# Altium PCB Tigershark 3D R2.2.PcbDoc (part 3 of 4)
Units mil, origin at the board's own origin, x right, y up, seen from the top; angles counter-clockwise.
Board outline 4100 x 4050 mil, 4 copper layers (Top Layer, Groun Plane, Power Plane, Bottom Layer), stack 61.73 mil thick; 359 components, 238 nets, 1141 pads, 830 vias.
Unrouted connection lines stored in the file: 3.
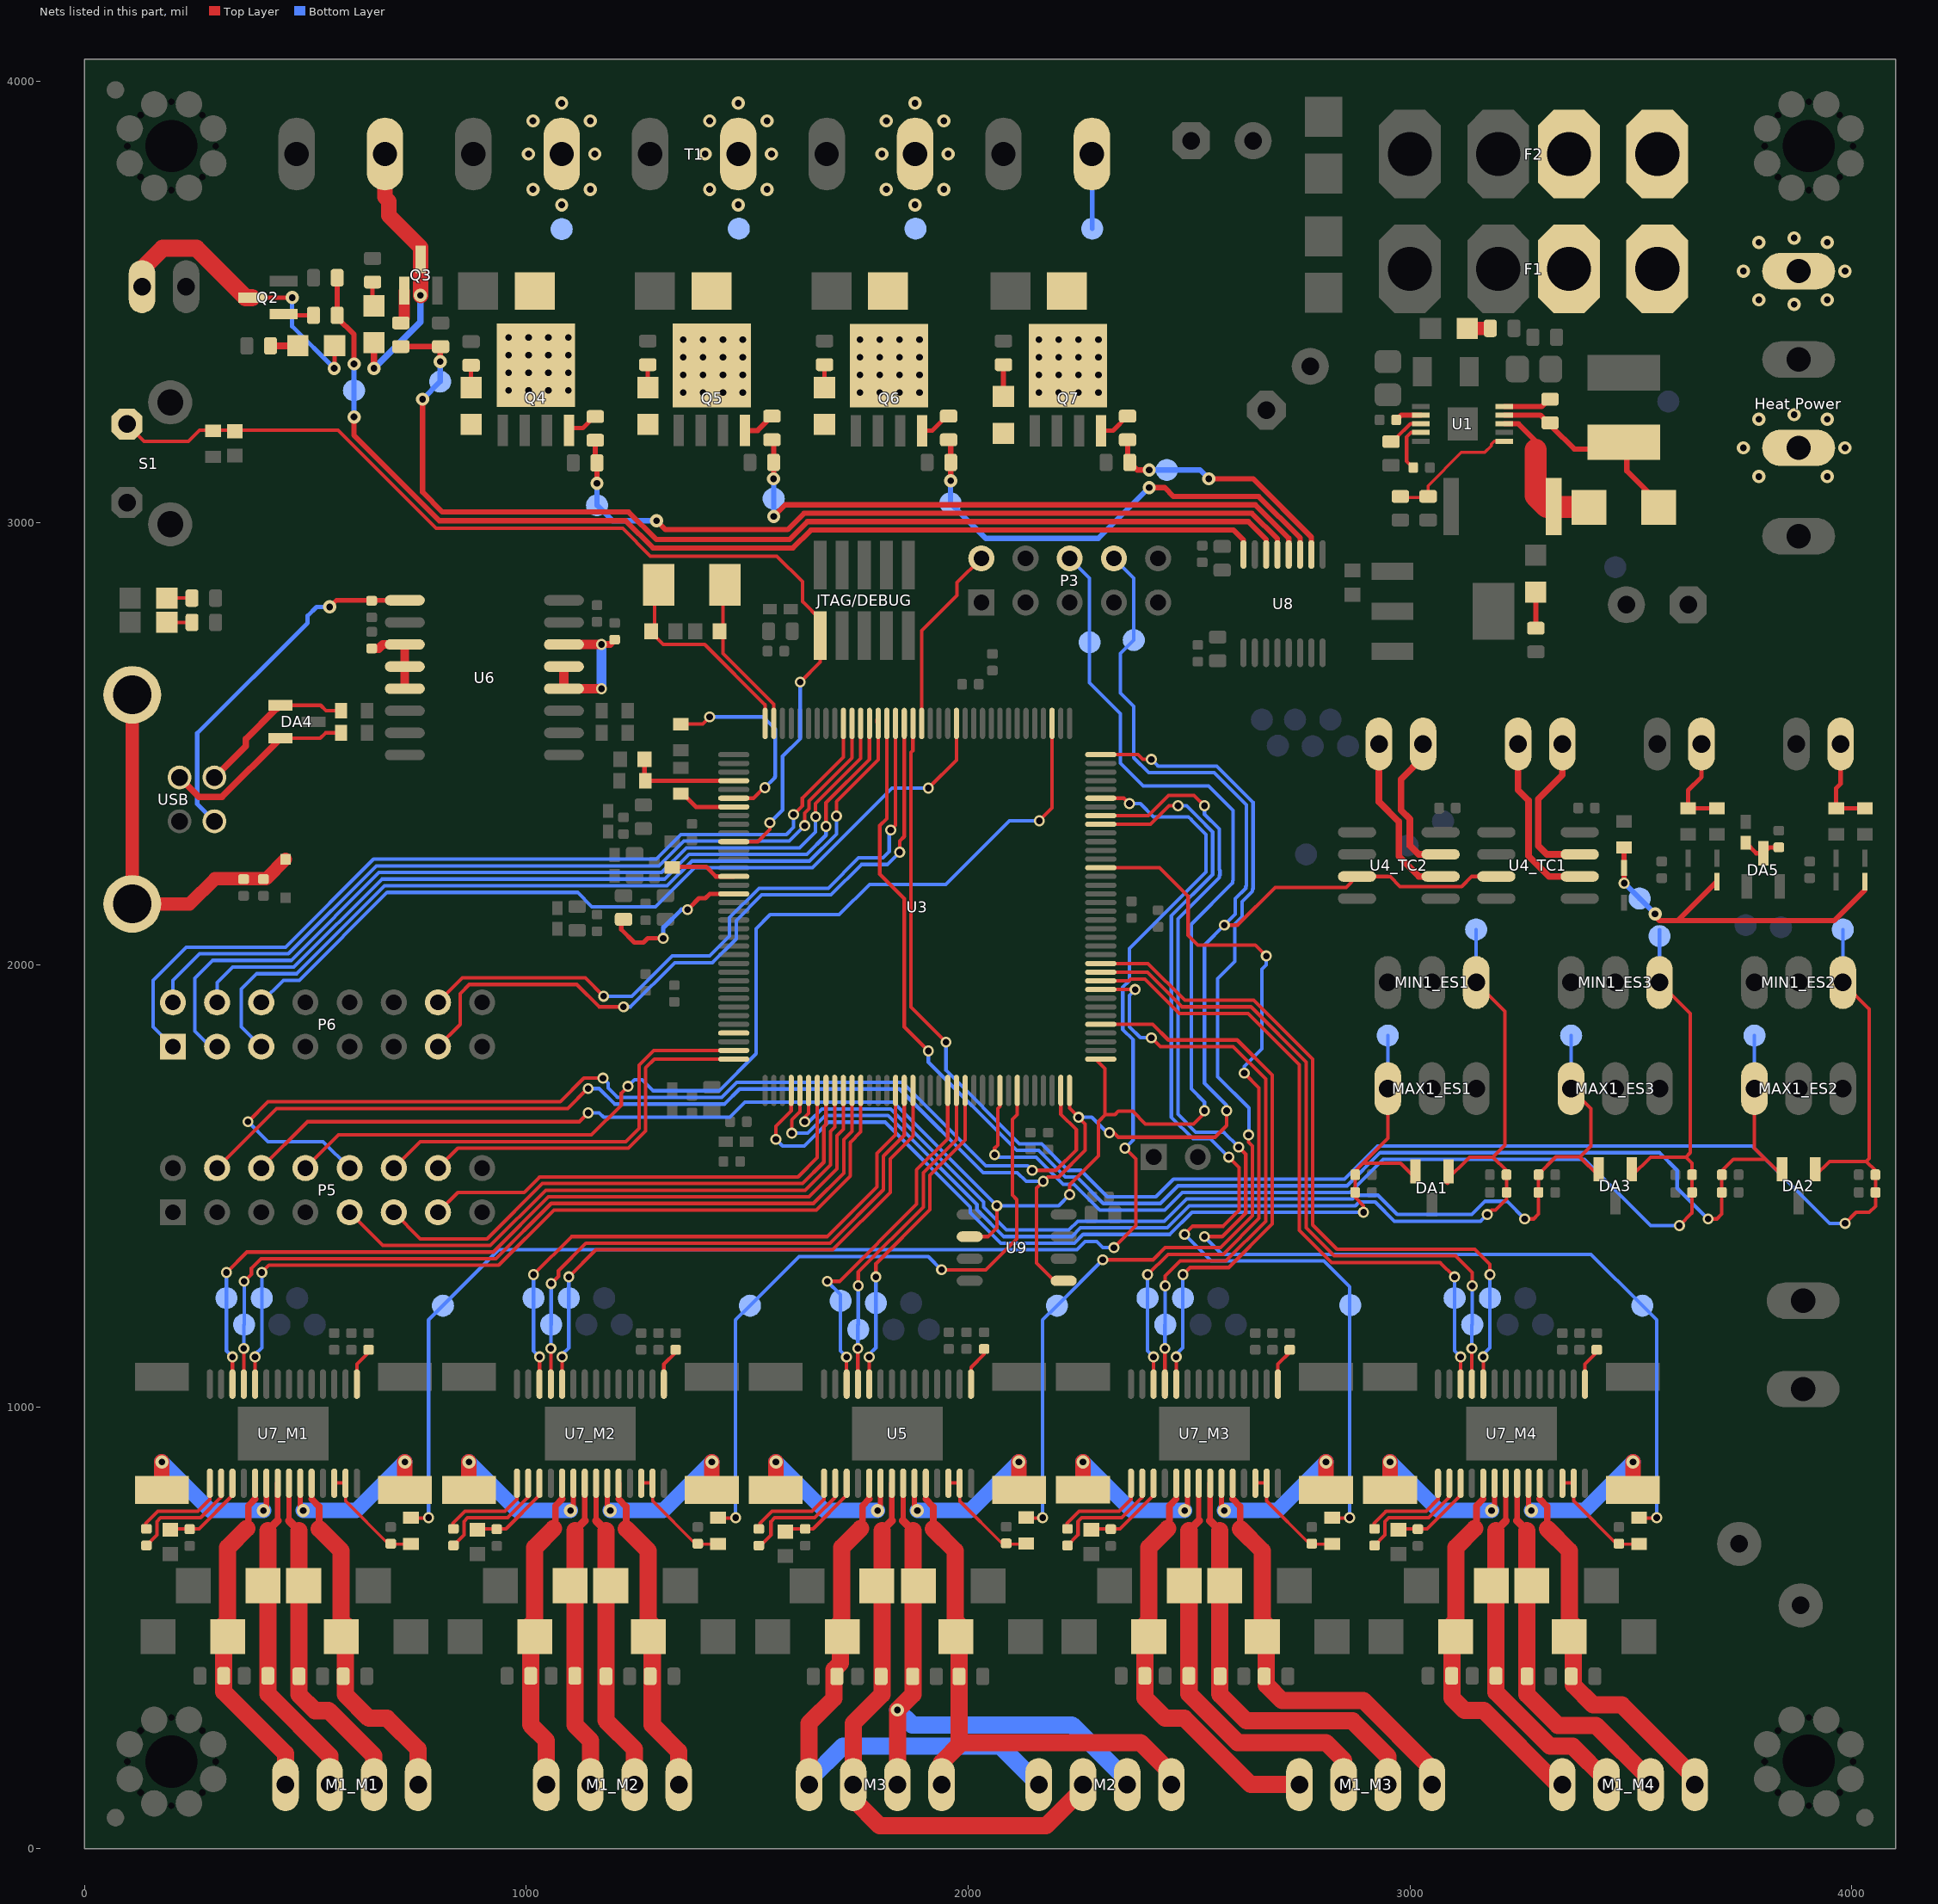
[diagram p5: the nets of this part, all layers, seen from the top]

## Via types
v1: diameter 30, hole 15, Top Layer to Bottom Layer, tented both sides, 528 vias
v2: diameter 25, hole 15, Top Layer to Bottom Layer, tented both sides, 154 vias
v3: diameter 19.68, hole 7.87, Top Layer to Bottom Layer, 75 vias
v4: diameter 25, hole 15, Top Layer to Bottom Layer, 61 vias
v5: diameter 30, hole 15, Top Layer to Bottom Layer, 9 vias
v6: diameter 45, hole 20, Top Layer to Bottom Layer, tented both sides, 2 vias
v7: diameter 25, hole 15, Top Layer to Bottom Layer, tented bottom, 1 vias

## Nets (pads, with @x,y where several pads share a name; then routed paths per layer and width w, separated by ;. In a path a pad name is that pad's centre, name@x,y a point inside that pad or via, vN(x,y) a via of type N, cw(c..) or ccw(c..) an arc to the next point about the centre after c; other vN are vias at no path point) (continued)
MAX_ES1: C2_ES1.1 DA1.2 MAX1_ES1.1 R3_ES1.1 TP10_ES1.1 U3.76 | length 2218.4
  Top Layer w8: v4(1565,1605) 1565,1635 1599.57,1669.57 U3.76@1599.57,1715.75 ; C2_ES1.1@2875,1532.56 2893.44,1551 ; C2_ES1.1@2876.3,1525 2876.1,1524.8 R3_ES1.1@2876.1,1485 2876.1,1473.9 2895,1455 v2(2895,1440) ; MAX1_ES1.1@2950,1720 2950,1607.56 2893.44,1551 ; DA1.2@3005,1509.8 3012.6,1517.4 2979,1551 2893.44,1551
  Bottom Layer w8: v4(1565,1605) 1580,1590 1629.45,1590 1683.45,1644 1812.36,1644 2005,1451.36 2005,1439.34 2074.34,1370 2240.55,1370 2260.55,1390 2456.77,1390 2506.77,1440 v2(2895,1440) v2@2885,1440 ; MAX1_ES1.1@2950,1720 TP10_ES1.1@2950,1840
MAX_ES2: C2_ES2.1 DA2.2 MAX1_ES2.1 R3_ES2.1 TP10_ES2.1 U3.22 | length 3424.7
  Top Layer w8: U3.22@1816.1,2546.46 1816.1,2331.1 1800,2315 1800,2205.47 1855.47,2150 1855.47,1859.53 v2(1910,1805) ; v2(3675,1425) 3695,1425 3706.1,1436.1 3706.1,1470 ; R3_ES2.1@3706.1,1485 3706.1,1533.66 3732.44,1560 3805,1560 ; MAX1_ES2.1@3780,1720 3780,1585 3842.6,1522.4 DA2.2@3840,1519.8
  Bottom Layer w8: v2(1910,1805) 1910,1780 2110,1580 2160,1580 2220,1520 2246.21,1520 2306.21,1460 2435,1460 2475,1500 2858.13,1500 2933.13,1575 3565,1575 3605,1535 3605,1495 v2(3675,1425) ; MAX1_ES2.1@3780,1720 TP10_ES2.1@3780,1840
MAX_ES3: C2_ES3.1 DA3.2 MAX1_ES3.1 R3_ES3.1 TP10_ES3.1 U3.78 | length 2506.6
  Top Layer w8: v4(1630,1645) 1630,1655 1638.94,1663.94 U3.78@1638.94,1715.75 ; v2(3260,1425) 3280,1425 3291.1,1436.1 3291.1,1470 ; C2_ES3.1@3289.95,1525 C2_ES3.1@3289.95,1526.41 ; R3_ES3.1@3291.1,1485 3291.1,1526.1 3330.43,1565.43 3385.43,1565.43 3410,1590 3410,1675 MAX1_ES3.1@3365,1720 ; 3385,1565 3427.6,1522.4 DA3.2@3425,1519.8
  Bottom Layer w8: v4(1630,1645) 1640,1645 1669,1674 1824.79,1674 2035,1463.79 2035,1451.77 2086.77,1400 2228.13,1400 2248.13,1420 2444.34,1420 2494.34,1470 2870.55,1470 2879.05,1478.5 2927.71,1478.5 2971.21,1435 3140,1435 3170,1465 3220,1465 v2(3260,1425) ; MAX1_ES3.1@3365,1720 TP10_ES3.1@3365,1840
MCCDZ: P5.14 U3.72 | length 855.6
  Top Layer w8: P5.14@800,1540 845,1585 1231.21,1585 1270,1623.79 1270,1766.77 1289.84,1786.61 U3.72@1469.65,1786.61
MCCK: P5.12 U3.71 | length 963.7
  Top Layer w8: P5.12@700,1540 760,1600 1225,1600 1255,1630 1255,1772.98 1288.32,1806.3 U3.71@1469.65,1806.3
MCDZ0: P5.10 U3.107 | length 2478.4
  Top Layer w8: v2(370,1645) 415,1690 1076.77,1690 1130.27,1743.5 v2(1173.5,1743.5) ; v2(2145,1535) 2198.79,1535 2245,1581.21 2245,1626.77 2209.8,1661.96 U3.107@2209.8,1715.75
  Bottom Layer w8: v2(370,1645) 415,1600 540,1600 P5.10@600,1540 ; v2(1173.5,1743.5) 1185,1732 1185,1721.21 1206.21,1700 1442.43,1700 1476.43,1734 1851,1734 2040,1545 2135,1545 v2(2145,1535)
MCDZ1: P5.9 U3.81 | length 1367.5
  Top Layer w8: P5.9@600,1440 675,1365 918.79,1365 1043.79,1490 1631.21,1490 1688.5,1547.29 1688.5,1623.06 1697.99,1632.55 U3.81@1697.99,1715.75
MCDZ2: P5.11 U3.80 | length 1234.5
  Top Layer w8: P5.11@700,1440 760,1380 911.21,1380 1036.21,1505 1625,1505 1673.5,1553.5 1673.5,1633.5 1678.31,1638.31 U3.80@1678.31,1715.75
MCDZ3: P5.13 U3.79 | length 1062
  Top Layer w8: P5.13@800,1440 845,1485 995,1485 1030,1520 1615,1520 1658.5,1563.5 1658.5,1715.63 U3.79@1658.62,1715.75
MIN_ES1: C1_ES1.1 DA1.1 MIN1_ES1.1 R2_ES1.1 TP9_ES1.1 U3.77 | length 2714.7
  Top Layer w8: v4(1600.76,1618.99) 1600.76,1648.99 1619.25,1667.49 U3.77@1619.25,1715.75 ; DA1.1@3085,1505 3080,1510 3135,1565 3188.03,1565 ; MIN1_ES1.1@3150,1960 3215,1895 3215,1591.97 3188.03,1565 ; v2(3175,1435) 3185,1445 3193.9,1445 3218.9,1470 ; R2_ES1.1@3218.9,1485 3218.9,1534.13 3188.03,1565
  Bottom Layer w8: v4(1600.76,1618.99) 1637.22,1618.99 1677.23,1659 1818.57,1659 2020,1457.57 2020,1445.55 2080.55,1385 2234.34,1385 2254.34,1405 2450.55,1405 2500.55,1455 2876.77,1455 2885.27,1463.5 2921.5,1463.5 2965,1420 3160,1420 v2(3175,1435) ; MIN1_ES1.1@3150,1960 TP9_ES1.1@3150,2080
MIN_ES2: C1_ES2.1 DA2.1 MIN1_ES2.1 R2_ES2.1 TP9_ES2.1 U3.19 | length 3959.1
  Top Layer w8: U3.19@1875.16,2546.46 1875,2546.3 1875,2485 1870.47,2480.47 1870.47,1904.53 v2(1950,1825) ; DA2.1@3920,1519.8 3917.4,1522.4 3950,1555 4033.03,1555 ; MIN1_ES2.1@3980,1960 4040,1900 4040,1561.97 4033.03,1555 ; v2(3985,1415) 4010,1440 4040,1440 4053.9,1453.9 4053.9,1470 ; R2_ES2.1@4053.9,1485 4053.9,1534.13 4033.03,1555
  Bottom Layer w8: v2(1950,1825) 1950,1761.21 2116.21,1595 2166.21,1595 2226.21,1535 2255,1535 2315,1475 2425,1475 2465,1515 2851.91,1515 2926.91,1590 3775,1590 3950,1415 v2(3985,1415) ; MIN1_ES2.1@3980,1960 TP9_ES2.1@3980,2080
MIN_ES3: C1_ES3.1 DA3.1 MIN1_ES3.1 R2_ES3.1 TP9_ES3.1 U3.100 | length 2708.2
  Top Layer w8: v4(2060,1570) 2060,1585 2067.32,1592.32 2067.32,1675 2072.01,1679.68 U3.100@2072.01,1715.75 ; DA3.1@3502.4,1522.4 3545,1565 3625,1565 ; MIN1_ES3.1@3565,1960 3635,1890 3635,1574.91 3625.04,1564.96 3638.7,1551.3 C1_ES3.1@3638.7,1525 R2_ES3.1@3638.7,1485 ; v2(3610,1410) 3638.7,1438.7 3638.7,1470
  Bottom Layer w8: v4(2060,1570) 2065,1565 2153.79,1565 2215.29,1503.5 2239.73,1503.5 2298.23,1445 2445,1445 2485,1485 2864.34,1485 2939.34,1560 3395,1560 3545,1410 v2(3610,1410) ; MIN1_ES3.1@3565,1960 TP9_ES3.1@3565,2080
MISO: P3.8 P5.4 TP7.1 U3.108 U4_TC1.7 U4_TC2.7 U9.5 | length 5232.5
  Top Layer w8: P5.4@300,1540 435,1675 1093.79,1675 1138.79,1720 v2(1140,1720) ; U9.5@2216.3,1285 2195,1285 2155,1325 2155,1495 v2(2170,1510) 2180,1520 2205,1520 2265,1580 2265,1640 v2(2250,1655) 2229.49,1675.51 U3.108@2229.49,1715.75 ; v2(2320,1620) 2330,1620 2340,1610 2558.79,1610 2585,1636.21 v2(2585,1670) ; v2(2580,2090) 2610,2090 2695,2175 2855.51,2175 U4_TC2.7@2880.51,2200 2955,2200 2977.81,2177.19 3117.19,2177.19 3140,2200 U4_TC1.7@3195.51,2200
  Bottom Layer w8: v2(1140,1720) 1165,1720 1200,1685 1448.64,1685 1482.64,1719 1844.79,1719 2033.79,1530 2111.21,1530 2131.21,1510 v2(2170,1510) ; v2(2250,1655) 2280,1655 2315,1620 v2(2320,1620) ; P3.8@2330,2920 2375,2875 TP7.1@2375,2735 2345,2705 2345,2615 2375,2585 2375,2468.64 2408.64,2435 2556.87,2435 2630,2361.87 2630,2178.64 2628.5,2177.14 2628.5,2172.99 2605,2149.49 2605,2115 v2(2580,2090) 2535,2045 2535,1732.02 2585,1682.02 v2(2585,1670) v2@2590,1670
MOD0E1: TP37_M1.1 U3.84 U7_M1.24 | length 1883.8
  Top Layer w8: U7_M1.24@386.02,1052.2 v2(386.02,1112.64) ; v2(401.26,1303.74) 417.52,1320 937.43,1320 1062.43,1445 1656.21,1445 1733.5,1522.29 1733.5,1598.21 1757.05,1621.75 U3.84@1757.05,1715.75
  Bottom Layer w8: v2(386.02,1112.64) 386.02,1118.57 401.23,1133.77 TP37_M1.1@401.23,1245.77 v2@401.23,1303.71
MOD0E2: TP37_M2.1 U3.90 U7_M2.24 | length 1306.4
  Top Layer w8: U7_M2.24@1081.02,1052.2 v2(1081.02,1112.64) ; v2(1096.26,1293.74) 1157.52,1355 1693.49,1355 1823.5,1485.01 1823.5,1560.93 1875.16,1612.58 U3.90@1875.16,1715.75
  Bottom Layer w8: v2(1081.02,1112.64) 1081.02,1118.57 1096.23,1133.77 TP37_M2.1@1096.23,1245.77 v2@1096.23,1293.71
MOD0E3: TP37_M3.1 U3.113 U7_M3.24 | length 1275.3
  Top Layer w8: U3.113@2300.35,1865.35 2417.88,1865.35 2453.23,1830 2609.08,1830 2688.5,1750.58 2688.5,1413.65 2589.85,1315 2502.52,1315 v4(2486.26,1298.74) ; U7_M3.24@2471.02,1052.2 v4(2471.02,1112.64)
  Bottom Layer w8: v4(2471.02,1112.64) 2471.02,1118.57 2486.23,1133.77 TP37_M3.1@2486.23,1245.77 v4@2486.23,1298.71
MOD0E4: TP37_M4.1 U3.120 U7_M4.24 | length 1659.1
  Top Layer w8: U3.120@2300.35,2003.15 2407.36,2003.15 2490.51,1920 2646.36,1920 2780,1786.36 2780,1411.36 2834.86,1356.5 3147.29,1356.5 3181.23,1322.56 v4(3181.23,1298.77) ; U7_M4.24@3166.02,1052.2 v4(3166.02,1112.64)
  Bottom Layer w8: v4(3166.02,1112.64) 3166.02,1118.57 3181.23,1133.77 TP37_M4.1@3181.23,1245.77 v4(3181.23,1298.77)
MOD0E_Z: TP19.1 U3.96 U5.24 | length 747.6
  Top Layer w8: U5.24@1776.06,1052.17 v4(1776.06,1112.61) ; v4(1791.26,1293.74) 1791.26,1323.69 1913.5,1445.93 1913.5,1523.65 1993.27,1603.41 U3.96@1993.27,1715.75
  Bottom Layer w8: v4@1776.06,1118.54 1791.26,1133.74 TP19.1@1791.26,1234.74 v4(1791.26,1293.74)
MOD1E1: TP36_M1.1 U3.83 U7_M1.25 | length 1893.3
  Top Layer w8: U7_M1.25@360.43,1052.2 v2(360.43,1132.05) ; v2(361.26,1283.74) 377.76,1300.24 377.76,1313.47 399.29,1335 931.21,1335 1056.21,1460 1650,1460 1718.5,1528.5 1718.5,1604.42 1737.36,1623.28 U3.83@1737.36,1715.75
  Bottom Layer w8: v2(360.43,1132.05) 360.43,1184.98 TP36_M1.1@361.23,1185.77 v2@361.23,1283.71
MOD1E2: TP36_M2.1 U3.89 U7_M2.25 | length 1318.4
  Top Layer w8: U7_M2.25@1055.43,1052.2 v2(1055.43,1132.05) ; v2(1056.26,1278.74) 1072.76,1295.24 1072.76,1307.76 1135,1370 1687.28,1370 1808.5,1491.22 1808.5,1567.14 1855.47,1614.11 U3.89@1855.47,1715.75
  Bottom Layer w8: v2(1055.43,1132.05) 1055.43,1184.98 TP36_M2.1@1056.23,1185.77 1056.23,1233.74 v2(1056.26,1278.74)
MOD1E3: TP36_M3.1 U3.117 U7_M3.25 | length 1361.4
  Top Layer w8: U3.117@2300.35,1944.09 v2(2378.11,1944.09) ; v2(2415,1835) 2435,1815 2600,1815 2673.5,1741.5 2673.5,1419.86 2583.64,1330 2480,1330 2446.26,1296.26 v4(2446.26,1273.74) ; U7_M3.25@2445.43,1052.2 v4(2445.43,1132.05)
  Bottom Layer w8: v2(2378.11,1944.09) 2365,1930.98 2365,1860 2390,1835 v2(2415,1835) ; v4(2445.43,1132.05) 2445.43,1184.98 TP36_M3.1@2446.23,1185.77 v4@2446.23,1265.77
MOD1E4: TP36_M4.1 U3.119 U7_M4.25 | length 1586
  Top Layer w8: U3.119@2300.35,1983.46 2405.84,1983.46 2484.3,1905 2640.15,1905 2765,1780.15 2765,1405.15 2828.65,1341.5 3103.5,1341.5 3141.23,1303.77 v4(3141.23,1273.77) ; U7_M4.25@3140.43,1052.2 v4(3140.43,1132.05)
  Bottom Layer w8: v4(3140.43,1132.05) 3140.43,1184.98 TP36_M4.1@3141.23,1185.77 v4@3141.23,1265.77
MOD1E_Z: TP18.1 U3.95 U5.25 | length 746.9
  Top Layer w8: U5.25@1750.46,1052.17 v4(1750.46,1132.02) ; v4(1751.26,1273.74) 1751.26,1304.9 1898.5,1452.14 1898.5,1529.86 1973.58,1604.94 U3.95@1973.58,1715.75
  Bottom Layer w8: v4(1750.46,1132.02) TP18.1@1750.46,1184.94 ; TP18.1@1751.26,1185.74 v4@1751.26,1265.74
MOD2E1: TP35_M1.1 U3.82 U7_M1.26 | length 1919.8
  Top Layer w8: v2(321.26,1303.74) 367.52,1350 925,1350 1050,1475 1640,1475 1703.5,1538.5 1703.5,1613.5 1717.68,1627.68 U3.82@1717.68,1715.75 ; U7_M1.26@334.84,1052.2 v2(334.84,1112.64)
  Bottom Layer w8: v2@321.23,1303.71 TP35_M1.1@321.23,1245.77 321.23,1126.25 v2(334.84,1112.64)
MOD2E2: TP35_M2.1 U3.88 U7_M2.26 | length 1347.6
  Top Layer w8: v2(1016.26,1298.74) 1102.52,1385 1681.07,1385 1793.5,1497.43 1793.5,1573.35 1835.79,1615.64 U3.88@1835.79,1715.75 ; U7_M2.26@1029.84,1052.2 v2(1029.84,1112.64)
  Bottom Layer w8: v2@1016.23,1298.71 TP35_M2.1@1016.23,1245.77 1016.23,1126.25 v2(1029.84,1112.64)
MOD2E3: TP35_M3.1 U3.131 U7_M3.26 | length 1703.6
  Top Layer w8: U3.131@2300.35,2219.68 2433.63,2219.68 2498,2155.32 2498,2067 2520,2045 2650,2045 v2(2675,2020) ; v4(2406.26,1298.74) 2452.52,1345 2577.43,1345 2658.5,1426.07 2658.5,1721.5 v2(2625,1755) ; U7_M3.26@2419.84,1052.2 v4(2419.84,1112.64)
  Bottom Layer w8: v4@2406.23,1298.71 TP35_M3.1@2406.23,1245.77 2406.23,1126.25 v4(2419.84,1112.64) ; v2(2625,1755) 2631.21,1755 2625,1761.21 2625,1770 2665,1810 2665,1990 2675,2000 v2(2675,2020)
MOD2E4: TP35_M4.1 U3.118 U7_M4.26 | length 1553.5
  Top Layer w8: U3.118@2300.35,1963.78 2364.56,1963.78 2368.38,1967.59 2400.49,1967.59 2478.09,1890 2633.93,1890 2750,1773.93 2750,1398.93 2822.43,1326.5 3068.5,1326.5 v4(3101.26,1293.74) ; U7_M4.26@3114.84,1052.2 v4(3114.84,1112.64)
  Bottom Layer w8: TP35_M4.1@3101.23,1245.77 3101.23,1126.25 v4(3114.84,1112.64) ; TP35_M4.1@3101.26,1245.8 v4(3101.26,1293.74) v4@3101.26,1298.74
MOD2E_Z: TP17.1 U3.94 U5.26 | length 810.8
  Top Layer w8: v4(1681.26,1283.74) 1708.89,1283.74 1883.5,1458.35 1883.5,1536.07 1953.9,1606.47 U3.94@1953.9,1715.75 ; U5.26@1724.87,1052.17 v4(1724.87,1112.61)
  Bottom Layer w8: v4(1681.26,1283.74) 1711.26,1253.74 1711.26,1126.22 v4(1724.87,1112.61)
MODE0_EXP1: P6.1 U3.27 | length 2044
  Top Layer w8: v2(1605,2340) 1624.85,2359.85 1624.85,2377.28 1717.68,2470.1 U3.27@1717.68,2546.46
  Bottom Layer w8: P6.1@200,1815 155,1860 155,1965 230,2040 455.15,2040 654.15,2239 1294,2239 1350,2295 1588.79,2295 1605,2311.21 v2(1605,2340)
MODE0_EXP2: P6.2 U3.26 | length 1900.9
  Top Layer w8: v2(1630,2315) 1630,2343.79 1639.85,2353.64 1639.85,2371.06 1737.36,2468.58 U3.26@1737.36,2546.46
  Bottom Layer w8: P6.2@200,1915 200,1965 260,2025 461.36,2025 660.36,2224 1300.21,2224 1356.21,2280 1595,2280 v2(1630,2315)
MODE1_EXP1: P6.3 U3.25 | length 2014.2
  Top Layer w8: v2(1654.85,2335.4) 1654.85,2364.85 1757.05,2467.05 U3.25@1757.05,2546.46
  Bottom Layer w8: P6.3@300,1815 285,1815 250,1850 250,1970 290,2010 467.57,2010 666.57,2209 1306.43,2209 1362.43,2265 1618.79,2265 1654.85,2301.06 v2(1654.85,2335.4)
MODE1_EXP2: P6.4 U3.24 | length 1855.3
  Top Layer w8: v2(1678.35,2313.35) 1678.35,2367.14 1776.73,2465.52 U3.24@1776.73,2546.46
  Bottom Layer w8: P6.4@300,1915 300,1960 335,1995 473.79,1995 672.79,2194 1312.64,2194 1368.64,2250 1635,2250 1678.35,2293.35 v2(1678.35,2313.35)
MODE2_EXP1: P6.5 U3.23 | length 1940.4
  Top Layer w8: v2(1701.85,2336.85) 1701.85,2369.42 1796.42,2463.99 U3.23@1796.42,2546.46 1793.64,2549.24 U3.23@1793.64,2555
  Bottom Layer w8: P6.5@400,1815 355,1860 355,1945 390,1980 480,1980 679,2179 1318.85,2179 1374.85,2235 1641.21,2235 1701.85,2295.64 v2(1701.85,2336.85)
MODE2_EXP2: P6.6 U3.14 | length 1910.6
  Top Layer w8: v2(1910,2400) 1973.58,2463.58 U3.14@1973.58,2546.46
  Bottom Layer w8: P6.6@400,1915 450,1965 486.21,1965 685.21,2164 1116,2164 1148.5,2131.5 1292.57,2131.5 1381.07,2220 1647.43,2220 1827.43,2400 v2(1910,2400)
MOSI: P3.6 P5.6 TP8.1 U3.109 U9.2 | length 4277.9
  Top Layer w8: P5.6@400,1540 505,1645 1120,1645 v2(1140,1665) ; U9.2@2003.7,1385 2045,1385 2065,1405 v2(2065,1455) ; v2(2230,1480) 2230,1502.57 2295,1567.57 2295,1645 2310.81,1660.81 ; U3.109@2290,1785 2310,1765 2310,1660.81 2332.57,1660.81 2340.27,1668.5 2372.71,1668.5 2401.21,1640 2510,1640 2540,1670 v2(2535,1670)
  Bottom Layer w8: v2(1140,1665) 1165,1665 1175,1655 1461.07,1655 1495.07,1689 1831,1689 v2(2065,1455) 2205,1455 v2(2230,1480) ; P3.6@2230,2920 2275,2875 2275,2638.79 2345,2568.79 2345,2456.21 2396.21,2405 2544.45,2405 2600,2349.45 2600,2191.07 2598.5,2189.57 2598.5,2185.41 2505,2091.91 2505,1719.59 2535,1689.59 v2(2535,1670)
NetC3_M1_1: C3_M1.1 D20_M1.A M1_M1.4 U7_M1.5 | length 770.2
  Top Layer w12: 386.02,791.02 U7_M1.5@386.02,827.8
  Top Layer w15: 367,724.48 370.76,728.24 370.76,775.76 386.02,791.02
  Top Layer w39: 367,724.48 324,681.48 324,515 315,506 315,355 455,215 M1_M1.4@455,145
NetC3_M2_1: C3_M2.1 D20_M2.A M1_M2.4 U7_M2.5 | length 726.8
  Top Layer w12: 1081.02,791.02 U7_M2.5@1081.02,827.8
  Top Layer w15: 1062,724.48 1065.76,728.24 1065.76,775.76 1081.02,791.02
  Top Layer w39: C3_M2.1@1009.77,391 1009.77,280.23 1045,245 M1_M2.4@1045,145 ; C3_M2.1@1010,391 1010,506 1019,515 1019,681.48 1062,724.48
NetC3_M3_1: C3_M3.1 D20_M3.A M1_M3.4 U7_M3.5 | length 947.2
  Top Layer w12: 2471.02,791.02 U7_M3.5@2471.02,827.8
  Top Layer w15: 2452,724.48 2455.76,728.24 2455.76,775.76 2471.02,791.02
  Top Layer w39: 2452,724.48 2409,681.48 2409,515 2400,506 2400,341.31 2446.31,295 2489.69,295 2639.69,145 M1_M3.4@2750,145
NetC3_M4_1: C3_M4.1 D20_M4.A M1_M4.4 U7_M4.5 | length 847.2
  Top Layer w12: 3166.02,791.02 U7_M4.5@3166.02,827.8
  Top Layer w15: 3147,724.48 3150.76,728.24 3150.76,775.76 3166.02,791.02
  Top Layer w39: 3147,724.48 3104,681.48 3104,515 3095,506 3095,341.31 3124.04,312.27 3167.73,312.27 3335,145 M1_M4.4@3345,145
NetC5_M1_1: C5_M1.1 D21_M1.A M1_M1.3 U7_M1.7 | length 750
  Top Layer w12: 437.2,742.2 U7_M1.7@437.2,827.8
  Top Layer w18: 415,720 437.2,742.2
  Top Layer w39: 415,720 415,350 555,210 M1_M1.3@555,145
NetC5_M2_1: C5_M2.1 D21_M2.A M1_M2.3 U7_M2.7 | length 706.5
  Top Layer w12: 1132.2,742.2 U7_M2.7@1132.2,827.8
  Top Layer w18: 1110,720 1132.2,742.2
  Top Layer w39: 1110,720 1110,280 1145,245 M1_M2.3@1145,145
NetC5_M3_1: C5_M3.1 D21_M3.A M1_M3.3 U7_M3.7 | length 954.1
  Top Layer w12: 2522.2,742.2 U7_M3.7@2522.2,827.8
  Top Layer w18: 2500,720 2522.2,742.2
  Top Layer w39: 2500,720 2500,350 2610,240 2810,240 2850,200 M1_M3.3@2850,145
NetC5_M4_1: C5_M4.1 D21_M4.A M1_M4.3 U7_M4.7 | length 825.5
  Top Layer w12: 3217.2,742.2 U7_M4.7@3217.2,827.8
  Top Layer w18: 3195,720 3217.2,742.2
  Top Layer w39: 3195,720 3195,353.77 3317.27,231.5 3368.4,231.5 3445,154.9 M1_M4.3@3445,145
NetC6_M1_1: C6_M1.1 D22_M1.A M1_M1.1 U7_M1.10 | length 806.8
  Top Layer w12: 513.98,791.02 U7_M1.10@513.98,827.8
  Top Layer w15: 513.98,791.02 531,774 531,724
  Top Layer w39: 531,724 581,674 581,515 590,506 590,348.74 643.74,295 685,295 755,225 M1_M1.1@755,145
NetC6_M2_1: C6_M2.1 D22_M2.A M1_M2.1 U7_M2.10 | length 739.1
  Top Layer w12: 1208.98,791.02 U7_M2.10@1208.98,827.8
  Top Layer w15: 1208.98,791.02 1226,774 1226,724
  Top Layer w39: 1226,724 1276,674 1276,515 1285,506 1285,280 1345,220 M1_M2.1@1345,145
NetC6_M3_1: C6_M3.1 D22_M3.A M1_M3.1 U7_M3.10 | length 977.7
  Top Layer w12: 2598.98,791.02 U7_M3.10@2598.98,827.8
  Top Layer w15: 2598.98,791.02 2616,774 2616,724
  Top Layer w39: 2616,724 2666,674 2666,515 2675,506 2675,370.46 2710.46,335 2895,335 3050,180 M1_M3.1@3050,145
NetC6_M4_1: C6_M4.1 D22_M4.A M1_M4.1 U7_M4.10 | length 866.3
  Top Layer w12: 3293.98,791.02 U7_M4.10@3293.98,827.8
  Top Layer w15: 3293.98,791.02 3311,774 3311,724
  Top Layer w39: 3311,724 3361,674 3361,515 3370,506 3370,370 3415,325 3480,325 3645,160 M1_M4.1@3645,145
NetC8_M1_1: C8_M1.1 D23_M1.A M1_M1.2 U7_M1.8 | length 780.7
  Top Layer w12: 462.8,742.2 U7_M1.8@462.8,827.8
  Top Layer w18: 462.8,742.2 485,720
  Top Layer w39: 485,720 485,348.82 521.58,312.24 552.76,312.24 655,210 M1_M1.2@655,145
NetC8_M2_1: C8_M2.1 D23_M2.A M1_M2.2 U7_M2.8 | length 718.9
  Top Layer w12: 1157.8,742.2 U7_M2.8@1157.8,827.8
  Top Layer w18: 1157.8,742.2 1180,720
  Top Layer w39: 1180,720 1180,290 1245,225 M1_M2.2@1245,145
NetC8_M3_1: C8_M3.1 D23_M3.A M1_M3.2 U7_M3.8 | length 990.1
  Top Layer w12: 2547.8,742.2 U7_M3.8@2547.8,827.8
  Top Layer w18: 2547.8,742.2 2570,720
  Top Layer w39: 2570,720 2570,350.05 2571,349.05 2571,347.82 2629.82,289 2870,289 2950,209 M1_M3.2@2950,145
NetC8_M4_1: C8_M4.1 D23_M4.A M1_M4.2 U7_M4.8 | length 858.5
  Top Layer w12: 3242.8,742.2 U7_M4.8@3242.8,827.8
  Top Layer w18: 3242.8,742.2 3265,720
  Top Layer w39: 3265,720 3265,348.82 3334.82,279 3421,279 3545,155 M1_M4.2@3545,145
NetC19_2: C19.2 DA5.3 FB1.1 | length 90.6
  Top Layer w10: FB1.1@3760,2276.38 3783.98,2252.4 DA5.3@3800,2252.4 3813.6,2266 C19.2@3835,2266
NetC22_1: C22.1 U1.4 | length 112
  Top Layer w8: C22.1@3007.3,3125 2992.52,3139.78 2992.52,3194.29 3002.97,3204.74 U1.4@3024.83,3204.74
NetC24_2: C24.2 D8.A R24.2 USB.5 USB.6 | length 862.1
  Top Layer w30: USB.5@108,2611.16 USB.6@108,2137.94 237.94,2137.94 295,2195 411,2195 D8.A@455,2239
NetC35_2: C35.2 R36.1 U5.3 | length 201.8
  Top Layer w8: C35.2@1583.77,721.27 1586.21,723.71 1649.07,723.71 1724.87,799.51 U5.3@1724.87,827.76
NetC40_1: C40.1 U1.10 | length 93.4
  Top Layer w12: U1.10@3213.8,3263.8 3298.8,3263.8 C40.1@3304.77,3269.77
NetC40_2: C40.2 D2.C L1.1 U1.9 | length 475.6
  Top Layer w12: U1.9@3213.8,3244.11 3295.12,3244.11 3323,3216.23 3371.97,3167.26 3491,3167.26 3491,3117.74 D2.C@3573.74,3035
NetC43_2: C43.2 U3.36 X2.1 | length 476.4
  Top Layer w8: X2.1@1300,2860 1290,2850 1290,2745 1310,2725 1403.79,2725 1540.51,2588.27 U3.36@1540.51,2546.46
NetC44_2: C44.2 U3.35 X2.2 | length 376.3
  Top Layer w8: X2.2@1445,2875 1445,2705 1560.2,2589.8 U3.35@1560.2,2546.46
NetC49_1: C49.1 U5.1 | length 218.5
  Top Layer w8: C49.1@1528.77,722.41 1528.77,736.5 1555.98,763.71 1646.65,763.71 1673.69,790.75 U5.1@1673.69,827.76
NetC49_2: C49.2 U5.2 | length 266.8
  Top Layer w8: C49.2@1528.77,684.71 1553.77,709.71 1553.77,740.29 1562.19,748.71 1652.86,748.71 1699.28,795.13 U5.2@1699.28,827.76
NetC50_2: C50.2 U5.15 | length 91.1
  Top Layer w8: U5.15@2006.6,1051.94 2006.6,1089.08 2036.26,1118.74 C50.2@2036.26,1130.74
NetC51_2: C51.2 R37.1 U5.12 U5.13 | length 255
  Top Layer w7: U5.12@1955.19,827.76 1980.78,827.76 1980.78,786.7 2078.3,689.18 R37.1@2128.77,689.18
NetC52_1: C52.1 D25.A M2.4 M3.4 U5.5 | length 1323.8
  Top Layer w12: 1776.06,790.99 U5.5@1776.06,827.76
  Top Layer w15: 1760.79,728.21 1760.79,775.73 1776.06,790.99
  Top Layer w39: M3.4@1640,145 1640,283.79 1696.26,340.05 1696.26,404.83 1711.26,419.83 1711.26,499.74 D25.A@1705.03,505.97 ; D25.A@1714.03,514.97 1714.03,681.45 1757.03,724.45
  Bottom Layer w39: M3.4@1640,145 1640,155 1716.5,231.5 2073.5,231.5 M2.4@2160,145
NetC56_2: C56.2 U6.12 U6.13 U6.14 | length 355.3
  Top Layer w15: v2(1170,2725) 1190,2725 C56.2@1201,2736
  Top Layer w22: U6.13@1085.12,2675 U6.12@1085.12,2625 v2(1170,2625) ; U6.14@1085.12,2725 v2(1170,2725)
  Bottom Layer w22: v2(1170,2625) v2(1170,2725)
NetC58_2: C58.2 U6.1 USB.1 | length 819.1
  Top Layer w10: v1(555,2810) 570,2825 U6.1@724.88,2825
  Bottom Layer w10: USB.1@294,2324.94 255,2363.94 255,2524 505,2774 505,2790 525,2810 v1(555,2810)
NetC59_2: C59.2 U6.3 U6.4 U6.5 | length 178.6
  Top Layer w20: C59.2@650,2716 666,2716 675,2725 U6.3@724.88,2725 U6.4@724.88,2675 U6.5@724.88,2625
NetC62_1: C62.1 D26.A M2.3 M3.3 U5.7 | length 1298.4
  Top Layer w12: 1827.24,742.17 U5.7@1827.24,827.76
  Top Layer w18: 1805.03,719.97 1827.24,742.17
  Top Layer w39: M3.3@1740,111.5 1800,51.5 2176.4,51.5 M2.3@2260,135.1 ; M3.3@1740,145 1740,283.76 1805.03,348.79 1805.03,719.97
NetC66_M1_2: C66_M1.2 R30_M1.1 U7_M1.3 | length 201.8
  Top Layer w8: C66_M1.2@193.74,721.3 196.18,723.74 259.04,723.74 334.84,799.54 U7_M1.3@334.84,827.8
NetC66_M2_2: C66_M2.2 R30_M2.1 U7_M2.3 | length 201.8
  Top Layer w8: C66_M2.2@888.74,721.3 891.18,723.74 954.04,723.74 1029.84,799.54 U7_M2.3@1029.84,827.8
NetC66_M3_2: C66_M3.2 R30_M3.1 U7_M3.3 | length 201.8
  Top Layer w8: C66_M3.2@2278.74,721.3 2281.18,723.74 2344.04,723.74 2419.84,799.54 U7_M3.3@2419.84,827.8
NetC66_M4_2: C66_M4.2 R30_M4.1 U7_M4.3 | length 201.8
  Top Layer w8: C66_M4.2@2973.74,721.3 2976.18,723.74 3039.04,723.74 3114.84,799.54 U7_M4.3@3114.84,827.8
NetC67_1: C67.1 D27.A M2.1 M3.1 U5.10 | length 1267.1
  Top Layer w12: 1904.01,790.99 U5.10@1904.01,827.76
  Top Layer w15: 1904.01,790.99 1921.03,773.97 1921.03,723.97
  Top Layer w39: 1921.03,723.97 1971.03,673.97 1971.03,514.97 1980.03,505.97 1979.49,505.42 C67.1@1979.49,389.74 1979.49,235 ; M3.1@1940,145 1940,195 1985,240 2390,240 2460,170 M2.1@2460,145
NetC68_M1_1: C68_M1.1 U7_M1.1 | length 218.5
  Top Layer w8: C68_M1.1@138.74,722.44 138.74,736.53 165.95,763.74 256.62,763.74 283.66,790.79 U7_M1.1@283.66,827.8
NetC68_M1_2: C68_M1.2 U7_M1.2 | length 266.8
  Top Layer w8: C68_M1.2@138.74,684.74 163.74,709.74 163.74,740.32 172.16,748.74 262.83,748.74 309.25,795.16 U7_M1.2@309.25,827.8
NetC68_M2_1: C68_M2.1 U7_M2.1 | length 218.5
  Top Layer w8: C68_M2.1@833.74,722.44 833.74,736.53 860.95,763.74 951.62,763.74 978.66,790.79 U7_M2.1@978.66,827.8
NetC68_M2_2: C68_M2.2 U7_M2.2 | length 266.8
  Top Layer w8: C68_M2.2@833.74,684.74 858.74,709.74 858.74,740.32 867.16,748.74 957.83,748.74 1004.25,795.16 U7_M2.2@1004.25,827.8
NetC68_M3_1: C68_M3.1 U7_M3.1 | length 218.5
  Top Layer w8: C68_M3.1@2223.74,722.44 2223.74,736.53 2250.95,763.74 2341.62,763.74 2368.66,790.79 U7_M3.1@2368.66,827.8
NetC68_M3_2: C68_M3.2 U7_M3.2 | length 266.8
  Top Layer w8: C68_M3.2@2223.74,684.74 2248.74,709.74 2248.74,740.32 2257.16,748.74 2347.83,748.74 2394.25,795.16 U7_M3.2@2394.25,827.8
NetC68_M4_1: C68_M4.1 U7_M4.1 | length 218.5
  Top Layer w8: C68_M4.1@2918.74,722.44 2918.74,736.53 2945.95,763.74 3036.62,763.74 3063.66,790.79 U7_M4.1@3063.66,827.8
NetC68_M4_2: C68_M4.2 U7_M4.2 | length 266.8
  Top Layer w8: C68_M4.2@2918.74,684.74 2943.74,709.74 2943.74,740.32 2952.16,748.74 3042.83,748.74 3089.25,795.16 U7_M4.2@3089.25,827.8
NetC71_M1_2: C71_M1.2 U7_M1.15 | length 88.9
  Top Layer w8: U7_M1.15@616.34,1052.2 616.34,1096.34 643.74,1123.74 C71_M1.2@643.74,1129.74
NetC71_M2_2: C71_M2.2 U7_M2.15 | length 88.9
  Top Layer w8: U7_M2.15@1311.34,1052.2 1311.34,1096.34 1338.74,1123.74 C71_M2.2@1338.74,1129.74
NetC71_M3_2: C71_M3.2 U7_M3.15 | length 88.9
  Top Layer w8: U7_M3.15@2701.34,1052.2 2701.34,1096.34 2728.74,1123.74 C71_M3.2@2728.74,1129.74
NetC71_M4_2: C71_M4.2 U7_M4.15 | length 88.9
  Top Layer w8: U7_M4.15@3396.34,1052.2 3396.34,1096.34 3423.74,1123.74 C71_M4.2@3423.74,1129.74
NetC72_1: C72.1 D28.A M2.2 M3.2 U5.8 | length 1302.2
  Top Layer w12: 1852.83,742.17 U5.8@1852.83,827.76
  Top Layer w18: 1852.83,742.17 1875.03,719.97
  Top Layer w39: M3.2@1840,145 v1(1840,313.76) 1875.03,348.79 1875.03,719.97
  Bottom Layer w39: v1(1840,313.76) 1873.76,280 2234.9,280 2360,154.9 M2.2@2360,145
NetC73_2: C73.2 R23.2 U3.40 | length 240.6
  Top Layer w10: C73.2@1267.56,2465 1267.56,2418.5 R23.2@1269.53,2416.54 ; R23.2@1278.35,2416.54 U3.40@1469.65,2416.54
NetC75_M1_2: C75_M1.2 R31_M1.1 U7_M1.12 U7_M1.13 | length 255
  Top Layer w7: U7_M1.12@565.16,827.8 590.75,827.8 590.75,786.73 688.27,689.21 R31_M1.1@738.74,689.21
NetC75_M2_2: C75_M2.2 R31_M2.1 U7_M2.12 U7_M2.13 | length 255
  Top Layer w7: U7_M2.12@1260.16,827.8 1285.75,827.8 1285.75,786.73 1383.27,689.21 R31_M2.1@1433.74,689.21
NetC75_M3_2: C75_M3.2 R31_M3.1 U7_M3.12 U7_M3.13 | length 255
  Top Layer w7: U7_M3.12@2650.16,827.8 2675.75,827.8 2675.75,786.73 2773.27,689.21 R31_M3.1@2823.74,689.21
NetC75_M4_2: C75_M4.2 R31_M4.1 U7_M4.12 U7_M4.13 | length 255
  Top Layer w7: U7_M4.12@3345.16,827.8 3370.75,827.8 3370.75,786.73 3468.27,689.21 R31_M4.1@3518.74,689.21
NetD2_A: D2.A R9.2 U1.8 | length 326.9
  Top Layer w12: U1.8@3213.8,3224.43 3245.67,3224.43 3284.88,3185.22 3284.88,3166
  Top Layer w50: 3284.88,3166 3284.88,3061.26 R9.2@3310.14,3036 ; R9.2@3325.14,3036 D2.A@3405,3036
NetD7_A: D7.A R8.1 | length 51.9
  Top Layer w30: D7.A@3130.1,3440.43 R8.1@3182,3440.43
NetD9_A: D9.A R11.1 | length 81.9
  Top Layer w12: R11.1@3285,2761.77 D9.A@3285,2843.66
NetD10_A: D10.A R13.1 | length 61.9
  Top Layer w15: R13.1@420.77,3401 D10.A@482.66,3401
NetD10_C: D10.C FAN-1.2 Q2.3 | length 738.3
  Top Layer w10: FAN-1.2@125,3495 FAN-1.2@125,3570 ; Q2.3@379.57,3510 v1(470,3510) ; v1(565,3350) 566,3351 D10.C@566,3401
  Top Layer w39: FAN-1.2@125,3570 176.5,3621.5 253.4,3621.5 364.9,3510 Q2.3@379.57,3510
  Bottom Layer w10: v1(470,3510) 470,3445 v1(565,3350)
NetD11_A: D11.A R47.1 | length 55.1
  Top Layer w10: R47.1@652,3545.23 652,3494.34 D11.A@655,3491.34
NetD11_C: D11.C Q3.3 T1.2 | length 595.2
  Top Layer w15: v1(655,3350) D11.C@655,3408
  Top Layer w35: T1.2@680,3810 680,3737.33 689,3728.33 689,3696 761,3624 Q3.3@761,3596.43 761,3515.4 v1@760.6,3515
  Bottom Layer w15: v1(655,3350) 760,3455 v1(760,3515)
NetD12_1: D12.1 D13.C Q4.5 T1.4 TP11.1
  other v1: 960,3300 1005,3300 1050,3300 1095,3300 960,3340 1005,3340 1050,3340 1095,3340 960,3380 1005,3380 1050,3380 1095,3380 960,3420 1005,3420 1050,3420 1095,3420 1080,3720 1015,3755 1145,3755 1005,3835 1155,3835 1015,3910 1145,3910 1080,3950
NetD13_A: D13.A R56.1 | length 50.5
  Top Layer w10: D13.A@875,3306.34 R56.1@875,3356.87
NetD14_A: D14.A R60.1 | length 51.9
  Top Layer w10: D14.A@1275,3306.34 R60.1@1275,3358.23
NetD14_C: D14.C D15.1 Q5.5 T1.6 TP12.1
  other v1: 1355,3295 1400,3295 1445,3295 1490,3295 1355,3335 1400,3335 1445,3335 1490,3335 1355,3375 1400,3375 1445,3375 1490,3375 1355,3415 1400,3415 1445,3415 1490,3415 1480,3720 1415,3755 1545,3755 1405,3835 1555,3835 1415,3910 1545,3910 1480,3950
NetD16_A: D16.A R64.1 | length 51.9
  Top Layer w10: D16.A@1675,3306.34 R64.1@1675,3358.23
NetD16_C: D16.C D17.1 Q6.5 T1.8 TP13.1
  other v1: 1755,3295 1800,3295 1845,3295 1890,3295 1755,3335 1800,3335 1845,3335 1890,3335 1755,3375 1800,3375 1845,3375 1890,3375 1755,3415 1800,3415 1845,3415 1890,3415 1880,3720 1815,3755 1945,3755 1805,3835 1955,3835 1815,3910 1945,3910 1880,3950
NetD18_A: D18.A R68.1 | length 52
  Top Layer w12: D18.A@2080,3289.72 2080,3341.69
NetD18_C: D18.C D19.1 Q7.5 T1.10 TP14.1 | length 141.3
  Bottom Layer w10: TP14.1@2281,3666 T1.10@2281,3807.32
  other v1: 2160,3295 2205,3295 2250,3295 2295,3295 2160,3335 2205,3335 2250,3335 2295,3335 2160,3375 2205,3375 2250,3375 2295,3375 2160,3415 2205,3415 2250,3415 2295,3415
NetD24_A: D24.A R25.2 | length 56.9
  Top Layer w8: D24.A@186.34,2830 R25.2@243.23,2830
NetD29_A: D29.A R26.2 | length 56.9
  Top Layer w8: D29.A@186.34,2775 R26.2@243.23,2775
NetF1_1: "Heat Power.3" F1.1
  other v1: 3790,3105 3945,3105 3755,3170 3985,3170 3790,3235 3945,3235 3870,3245
NetF2_1: "Heat Power.1" F2.1
  other v1: 3870,3495 3790,3505 3945,3505 3755,3570 3985,3570 3790,3635 3945,3635 3870,3645
NetP2_TR1_1: P2_TR1.1 R14_TR1.2 R19_TR1.1 | length 214.6
  Top Layer w10: P2_TR1.1@3975,2500 3975,2410 3965,2400 R19_TR1.1@3965,2354.53 R14_TR1.2@4030,2354.53
NetP2_TR2_1: P2_TR2.1 R14_TR2.2 R19_TR2.1 | length 222.9
  Top Layer w10: P2_TR2.1@3660,2500 3660,2425 3630,2395 R19_TR2.1@3630,2354.53 R14_TR2.2@3695,2354.53
NetQ2_1: Q2.1 R45.2 | length 68.9
  Top Layer w10: Q2.1@450.43,3472.6 453.03,3470 R45.2@518.23,3470
NetQ3_1: Q3.1 R52.2 | length 73.2
  Top Layer w25: R52.2@716,3455.53 723.6,3463.13 Q3.1@723.6,3525.57
NetQ4_4: Q4.4 R58.2 | length 73.2
  Top Layer w10: Q4.4@1096.5,3209.66 1101.36,3214.53 1127.75,3214.53 R58.2@1156,3242.77
NetQ5_4: Q5.4 R62.2 | length 74.5
  Top Layer w12: Q5.4@1495,3209.28 1523.5,3209.28 R62.2@1556,3241.77
NetQ6_4: Q6.4 R66.2 | length 72.4
  Top Layer w10: Q6.4@1896,3208.85 1918.85,3208.85 R66.2@1953.89,3243.89
NetQ7_4: Q7.4 R70.2 | length 73.6
  Top Layer w10: Q7.4@2301,3208.85 2328.08,3208.85 R70.2@2361,3241.77
NetR4_1: R4.1 U3.51 | length 158.6
  Top Layer w10: R4.1@1320,2221.57 1407.47,2221.57 1429.04,2200 U3.51@1469.65,2200
NetR5_2: R5.2 U3.42 | length 454.8
  Top Layer w8: R5.2@1350,2545.16 1399.06,2545.16 v2(1415,2561.1) ; U3.42@1469.65,2377.17 1514.29,2377.17 v2@1540,2402.87
  Bottom Layer w8: v2(1415,2561.1) 1536.1,2561.1 1563.5,2533.7 1563.5,2426.37 1562.5,2425.37 1562.5,2423.6 v2(1540,2401.1)
NetR6_1: R6.1 U3.53 | length 353.1
  Top Layer w10: R6.1@1215,2093.23 1215,2080 1244.5,2050.5 1265.15,2050.5 1274.65,2060 v2(1310,2060) ; v2@1360,2120 1370,2120 1370,2129.65 1390.85,2150.5 1405.15,2150.5 1415.28,2160.63 U3.53@1469.65,2160.63
  Bottom Layer w10: v2(1310,2060) 1310,2085 1310.5,2085.5 1311.62,2085.5 1351.12,2125 v2(1365,2125)
NetR7_1: R7.1 U1.3 | length 76.4
  Top Layer w8: R7.1@2961.84,3192.14 2969.14,3192.14 3001.43,3224.43 U1.3@3024.83,3224.43
NetR10_2: R10.2 R12.1 U1.6 | length 291.8
  Top Layer w7: R12.1@2977.36,3057.6 R10.2@3033.45,3057.6 ; R10.2@3041,3065.15 3041,3084 3116.56,3159.56 3169.25,3159.56 3184.18,3174.49 3184.18,3178.18 3191.06,3185.06 U1.6@3213.8,3185.06
NetR17_1: R17.1 U1.2 | length 56.9
  Top Layer w12: R17.1@2971.68,3235.05 2980.73,3244.11 U1.2@3024.83,3244.11
NetR22_2: R22.2 U3.43 | length 129.5
  Top Layer w10: R22.2@1353.05,2388.52 1384.09,2357.48 U3.43@1469.65,2357.48
NetR32_M1_2: R32_M1.2 U7_M1.9 | length 404.1
  Top Layer w12: U7_M1.9@488.39,827.8 488.39,771.61 v1(495,765)
  Top Layer w35: R32_M1.2@725,812.05 v1(725,875)
  Bottom Layer w35: v1(495,765) 615,765 v1(725,875)
NetR32_M2_2: R32_M2.2 U7_M2.9 | length 404.1
  Top Layer w12: U7_M2.9@1183.39,827.8 1183.39,771.61 v1(1190,765)
  Top Layer w35: R32_M2.2@1420,812.05 v1(1420,875)
  Bottom Layer w35: v1(1190,765) 1310,765 v1(1420,875)
NetR32_M3_2: R32_M3.2 U7_M3.9 | length 404.1
  Top Layer w12: U7_M3.9@2573.39,827.8 2573.39,771.61 v1(2580,765)
  Top Layer w35: R32_M3.2@2810,812.05 v1(2810,875)
  Bottom Layer w35: v1(2580,765) 2700,765 v1(2810,875)
NetR32_M4_2: R32_M4.2 U7_M4.9 | length 404.1
  Top Layer w12: U7_M4.9@3268.39,827.8 3268.39,771.61 v1(3275,765)
  Top Layer w35: R32_M4.2@3505,812.05 v1(3505,875)
  Bottom Layer w35: v1(3275,765) 3395,765 v1(3505,875)
NetR33_M1_2: R33_M1.2 U7_M1.6 | length 404.1
  Top Layer w12: v1(405,765) 411.61,771.61 U7_M1.6@411.61,827.8
  Top Layer w35: R33_M1.2@175,812.05 v1(175,875)
  Bottom Layer w35: v1(175,875) 285,765 v1(405,765)
NetR33_M2_2: R33_M2.2 U7_M2.6 | length 404.1
  Top Layer w12: v1(1100,765) 1106.61,771.61 U7_M2.6@1106.61,827.8
  Top Layer w35: R33_M2.2@870,812.05 v1(870,875)
  Bottom Layer w35: v1(870,875) 980,765 v1(1100,765)
NetR33_M3_2: R33_M3.2 U7_M3.6 | length 404.1
  Top Layer w12: v1(2490,765) 2496.61,771.61 U7_M3.6@2496.61,827.8
  Top Layer w35: R33_M3.2@2260,812.05 v1(2260,875)
  Bottom Layer w35: v1(2260,875) 2370,765 v1(2490,765)
NetR33_M4_2: R33_M4.2 U7_M4.6 | length 404.1
  Top Layer w12: v1(3185,765) 3191.61,771.61 U7_M4.6@3191.61,827.8
  Top Layer w35: R33_M4.2@2955,812.05 v1(2955,875)
  Bottom Layer w35: v1(2955,875) 3065,765 v1(3185,765)
NetR38_2: R38.2 U5.9 | length 404.1
  Top Layer w12: U5.9@1878.42,827.76 1878.42,771.58 v1(1885.03,764.97)
  Top Layer w35: R38.2@2115.03,812.02 v1(2115.03,874.97)
  Bottom Layer w35: v1(1885.03,764.97) 2005.03,764.97 v1(2115.03,874.97)
NetR39_2: R39.2 U5.6 | length 404.1
  Top Layer w12: v1(1795.03,764.97) 1801.65,771.58 U5.6@1801.65,827.76
  Top Layer w35: R39.2@1565.03,812.02 v1(1565.03,874.97)
  Bottom Layer w35: v1(1565.03,874.97) 1675.03,764.97 v1(1795.03,764.97)
NetR45_1: R45.1 R46.1 TP41.1 U8.16 | length 2547.7
  Top Layer w12: R45.1@571.77,3465 610,3426.77 v1(610,3360) ; R45.1@571.77,3470 R46.1@571.77,3555 ; v1@605,3240 610,3235 610,3198.13 803.13,3005 1225,3005 1286.51,2943.49 1603.49,2943.49 1644,2984 2601,2984 2623.43,2961.57 U8.16@2623.43,2928.66
  Bottom Layer w12: v1(610,3240) TP41.1@610,3300 v1(610,3360)
NetR52_1: R52.1 R55.1 TP42.1 U8.14 | length 2458
  Top Layer w12: R52.1@716,3399.23 R55.1@806,3399.23 805,3398.23 v1(805,3365) ; v1(765,3280) 765,3070 810,3025 1231.87,3025 1294.38,2962.49 1595.62,2962.49 1636.13,3003 2634.52,3003 2674.61,2962.91 U8.14@2674.61,2928.66
  Bottom Layer w12: v1(765,3280) TP42.1@805,3320 v1(805,3365)
NetR58_1: R58.1 R59.1 TP48.1 U8.13 | length 1781.3
  Top Layer w12: R59.1@1156,3139.77 R58.1@1156,3187.23 ; R59.1@1159.77,3136 1160,3135.77 v1(1160,3090) ; v1(1295,3005) 1315,2985 1591.26,2985 1628.26,3022 2642.39,3022 2700.2,2964.19 U8.13@2700.2,2928.66
  Bottom Layer w12: v1(1160,3090) TP48.1@1160,3040 1195,3005 v1(1295,3005)
NetR62_1: R62.1 R63.1 TP49.1 U8.12 | length 1414.2
  Top Layer w12: v1(1559.77,3100) R63.1@1559.77,3137 R62.1@1559.77,3184.46 ; v1(1560,3015) 1586,3041 2650.26,3041 2725.8,2965.46 U8.12@2725.8,2928.66
  Bottom Layer w12: v1(1559.77,3100) 1559.77,3045.23 1560,3045 v1(1560,3015)
NetR66_1: R66.1 R67.1 TP50.1 U8.11 | length 1088.9
  Top Layer w12: v1(1960.77,3095.77) R67.1@1960.77,3137 R66.1@1960.77,3183.46 ; v1@2420,3080 2445,3080 2465,3060 2658.13,3060 2751.39,2966.74 U8.11@2751.39,2928.66
  Bottom Layer w12: v1(1960.77,3095.77) 1960,3095 TP50.1@1960,3045 2040,2965 2295,2965 2405,3075 v1@2415,3075
  other v1: 2410,3080
NetR70_1: R70.1 R71.1 TP51.1 U8.10 | length 573.8
  Top Layer w12: R70.1@2361,3188.23 2361,3141.77 R71.1@2365.77,3137 2382.77,3120 v1(2410,3120) ; v1(2545,3100) 2645,3100 2776.98,2968.02 U8.10@2776.98,2928.66
  Bottom Layer w12: v1(2410,3120) 2525,3120 v1(2545,3100)
NetT2_TC1_1: T2_TC1.1 U4_TC1.3 | length 355.1
  Top Layer w15: T2_TC1.1@3345,2500 3345,2429.49 3290.51,2375 3290.51,2269.49 3310,2250 U4_TC1.3@3384.49,2250
NetT2_TC1_2: T2_TC1.2 U4_TC1.2 | length 398.5
  Top Layer w15: T2_TC1.2@3245,2500 3245,2395.51 3268.51,2372 3268.51,2246.49 3315,2200 U4_TC1.2@3384.49,2200
NetT2_TC2_1: T2_TC2.1 U4_TC2.3 | length 336.8
  Top Layer w15: T2_TC2.1@3030,2500 3030,2470 2980,2420 2980,2350 3000,2330 3000,2270 3020,2250 U4_TC2.3@3069.49,2250
NetT2_TC2_2: T2_TC2.2 U4_TC2.2 | length 386.5
  Top Layer w15: T2_TC2.2@2930,2500 2930,2368.89 2975,2323.89 2975,2245.51 3020.51,2200 U4_TC2.2@3069.49,2200
NRST: U3.69
OVREF: D1.2 D3_TR1.2 D3_TR2.2 R1.1 TP2.1 | length 828.2
  Top Layer w12: v2(3485,2185) D1.2@3485,2219.37 R1.1@3485,2260 ; v1(3555,2115) 3555,2110 3565,2100 3960,2100 4030,2170 D3_TR1.2@4030,2188.43 ; 3608.29,2101.71 D3_TR2.2@3695,2188.43
  Bottom Layer w12: v2(3485,2185) TP2.1@3520,2150 v1(3555,2115)
R_N: DA4.1 R18.2 USB.2 | length 368.4
  Top Layer w8: DA4.1@443.48,2587.4 534.39,2587.4 546.8,2575 R18.2@580.47,2575
  Top Layer w15: USB.2@294,2424.15 365,2495.15 365,2510.84 433.66,2579.5 435.58,2579.5 DA4.1@443.48,2587.4
R_P: DA4.2 R20.2 USB.3 | length 443.8
  Top Layer w8: DA4.2@443.48,2512.6 533.48,2512.6 545.88,2525 R20.2@580.47,2525
  Top Layer w15: USB.3@215,2424.15 259.15,2380 310.88,2380 DA4.2@443.48,2512.6
REF1: R31_M1.2 TP33_M1.1 U3.139 | length 3458.9
  Top Layer w8: R31_M1.2@738.74,748.27 778.27,748.27 v4(778.74,748.74) ; U3.139@2300.35,2377.17 2352.83,2377.17 v2(2365,2365) ; v4@2325,1355 2380,1410 2380,1530.39 2379.47,1530.92 2379.47,1560.53 v4(2355,1585)
  Bottom Layer w8: v4(778.74,748.74) 778.74,1196.26 937.48,1355 2246.77,1355 2265.27,1373.5 2291.5,1373.5 2305,1360 v4(2330,1360) ; v4(2355,1585) 2373.5,1603.5 2373.5,1830.29 2350,1853.79 2350,1949.22 2365,1964.22 2365,2036.77 2538.5,2210.27 2538.5,2294.73 2505,2328.23 2505,2328.79 2498.79,2335 2420,2335 2390,2365 v2(2365,2365)
REF2: R31_M2.2 TP33_M2.1 U3.102 | length 1569.5
  Top Layer w8: R31_M2.2@1433.74,748.27 1473.27,748.27 v4(1473.74,748.74) ; v7(1940,1310) 2040,1310 2110,1380 2110,1468.79 2100,1478.79 2100,1650 2111.38,1661.38 U3.102@2111.38,1715.75
  Bottom Layer w8: v4(1473.74,748.74) 1473.74,1196.26 ; 1473.78,1196.26 TP33_M2.1@1506.26,1228.74 1617.52,1340 1910,1340 v7(1940,1310)
REF3: R31_M3.2 TP33_M3.1 U3.136 | length 2408.7
  Top Layer w8: U3.136@2300.35,2318.11 2413.11,2318.11 2455,2360 v2(2475,2360) ; v4(2490,1390) 2508.5,1408.5 2577.29,1408.5 2613.5,1444.71 2613.5,1541.5 v4(2590,1565) ; R31_M3.2@2823.74,748.27 2863.27,748.27 v4(2863.74,748.74)
  Bottom Layer w8: v2(2475,2360) 2495,2360 2520,2335 2520,2334.45 2553.5,2300.95 2553.5,2204.05 2460,2110.55 2460,1655.55 2509.05,1606.5 2548.5,1606.5 v4(2590,1565) ; v4(2490,1390) 2550,1330 2805,1330 2863.74,1271.26 v4(2863.74,748.74)
REF4: R31_M4.2 TP33_M4.1 U3.137 | length 3044.7
  Top Layer w8: U3.137@2300.35,2337.8 2407.8,2337.8 2453.5,2383.5 2511.5,2383.5 v2(2535,2360) ; v4(2535,1385) 2575,1385 2628.5,1438.5 2628.5,1571.75 v4(2612.63,1587.63) ; R31_M4.2@3518.74,748.27 3558.27,748.27 v4(3558.74,748.74)
  Bottom Layer w8: v4(2535,1385) 2575,1345 3410,1345 TP33_M4.1@3526.26,1228.74 3558.74,1196.26 v4(3558.74,748.74) ; v2(2535,2360) 2535,2340.66 2568.5,2307.16 2568.5,2214.99 2570,2213.49 2570,2203.49 2568.5,2201.99 2568.5,2197.84 2475,2104.34 2475,1661.77 2515.27,1621.5 2578.75,1621.5 v4(2612.63,1587.63)
REF_EXP1: P6.13 U3.20 | length 1630.3
  Top Layer w8: P6.13@800,1815 850,1865 850,1935 870.53,1955.53 1114.47,1955.53 1165,1905 v2(1220,1905) ; v2(1845,2255) 1845,2280 1855.47,2290.47 U3.20@1855.47,2546.46
  Bottom Layer w8: v2(1220,1905) 1236.21,1905 1336.21,2005 1421.21,2005 1475,2058.79 1475,2100.41 1533.09,2158.5 1689.71,2158.5 1758.32,2227.1 1817.1,2227.1 v2(1845,2255)
REF_EXP2: P6.14 U3.21 | length 1517.6
  Top Layer w8: P6.14@800,1915 855.53,1970.53 1133.47,1970.53 v2(1175,1929) ; v2(1825,2305) 1835.79,2315.79 U3.21@1835.79,2546.46
  Bottom Layer w8: v2(1175,1929) 1239,1929 1330,2020 1415,2020 1460,2065 1460,2106.62 1526.88,2173.5 1683.5,2173.5 1752.1,2242.1 1807.1,2242.1 1821.5,2256.5 1821.5,2301.5 v2(1825,2305)
REF_Z: R37.2 TP15.1 U3.144 | length 2451.1
  Top Layer w8: R37.2@2128.77,748.24 2168.3,748.24 v4(2168.77,748.71) ; U3.144@2300.35,2475.59 2384.41,2475.59 2395,2465 v2(2415,2465) ; v4(2305,1332.48) 2418.79,1332.48 2446.31,1360 2571.21,1360 2643.5,1432.29 2643.5,1589.99 2635,1598.49 v2(2635,1615)
  Bottom Layer w8: v4(2168.77,748.71) 2168.77,1196.23 ; 2168.78,1196.26 TP15.1@2201.26,1228.74 v4(2305,1332.48) ; v2(2415,2465) 2430,2450 2563.09,2450 2645,2368.09 2645,2172.43 2643.5,2170.93 2643.5,2166.77 2620,2143.27 2620,2108.79 2603.5,2092.29 2603.5,2007.29 2565,1968.79 2565,1746.77 2635.61,1676.16 v2@2635.61,1615
RESET: C63.2 JTAG/DEBUG.10 R21.1 S1.1 U3.47 | length 2415
  Top Layer w8: S1.1@96,3224 135,3185 235,3185 260,3210 574.09,3210 796.09,2988 1217.96,2988 1280.96,2925 1567,2925 1625,2867 1625,2822.11 1665,2782.11 JTAG/DEBUG.10@1665,2745.08 1665,2685 v2(1620,2640) ; U3.47@1469.65,2278.74 1523.74,2278.74 1551.19,2306.19 v2(1551.19,2321.6)
  Bottom Layer w8: v2(1551.19,2321.6) 1580,2350.41 1580,2472.2 1620,2512.2 v2(1620,2640)
RXD0: P5.8 U3.3 | length 2421.7
  Top Layer w8: P5.8@500,1540 575,1615 1147.57,1615 1215,1682.43 1215,1710 v2(1230,1725) ; v2(2161.1,2326.1) 2190.12,2355.12 U3.3@2190.12,2546.46
  Bottom Layer w8: v2(1230,1725) 1245,1740 1262.02,1740 1287.02,1715 1436.21,1715 1520,1798.79 1520,2081.77 1551.73,2113.5 1708.35,2113.5 1776.96,2182.1 1949.53,2182.1 2093.53,2326.1 v2(2161.1,2326.1)
RXD1: P3.2 U3.18 | length 429.5
  Top Layer w8: U3.18@1894.84,2546.46 1894.84,2756.06 1975,2836.21 1975,2865 P3.2@2030,2920